# Altium PCB PCB1.PcbDoc
Units mm, origin at the board's own origin, x right, y up, seen from the top; angles counter-clockwise.
Board outline 20 x 20 mm, 2 copper layers (Top Layer, Bottom Layer); 5 components, 4 nets, 10 pads, 1 vias.
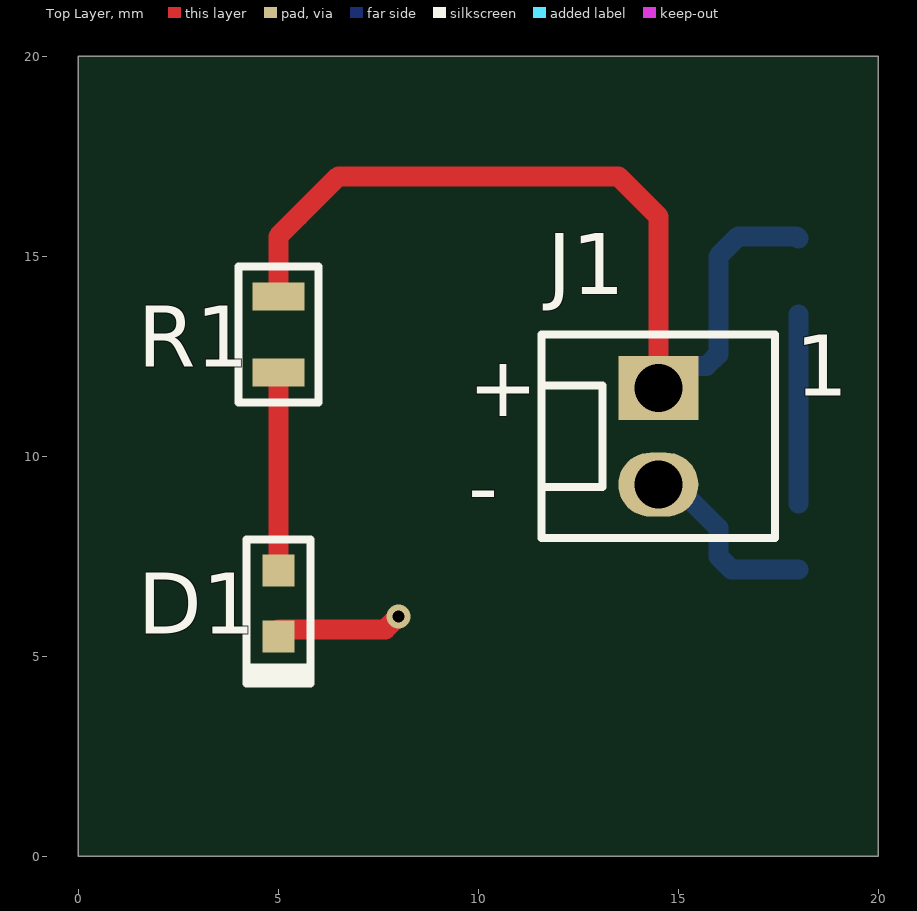
[diagram p0: Top Layer view]
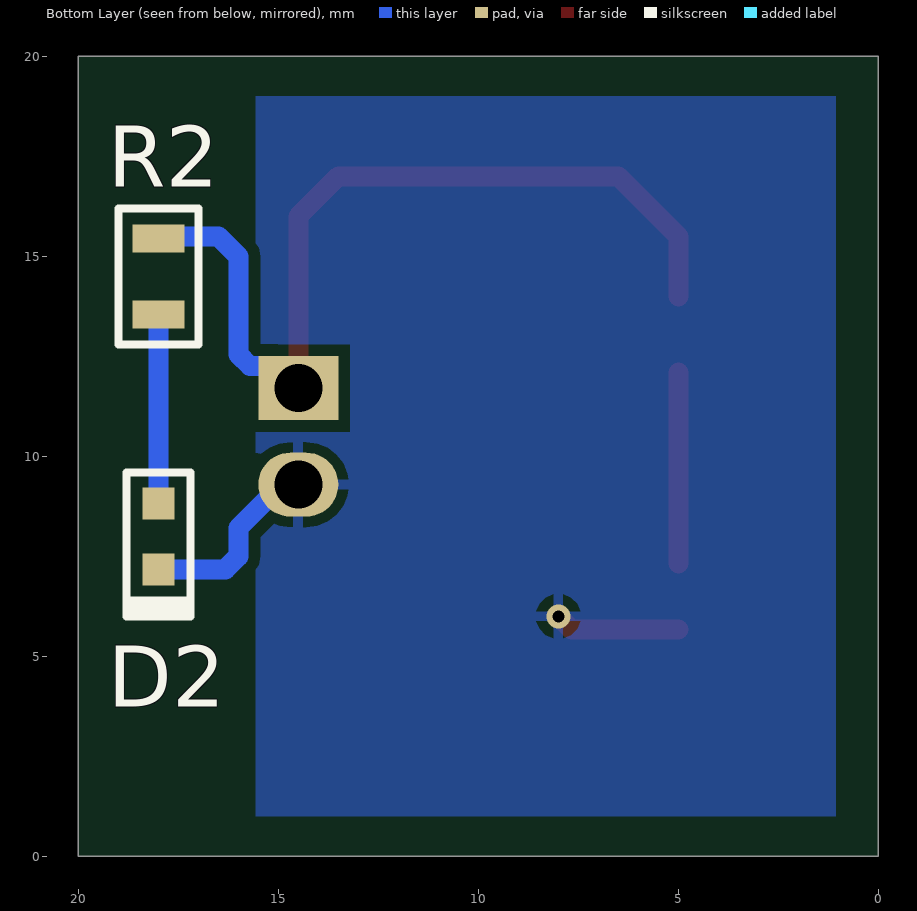
[diagram p1: Bottom Layer view, seen from below]
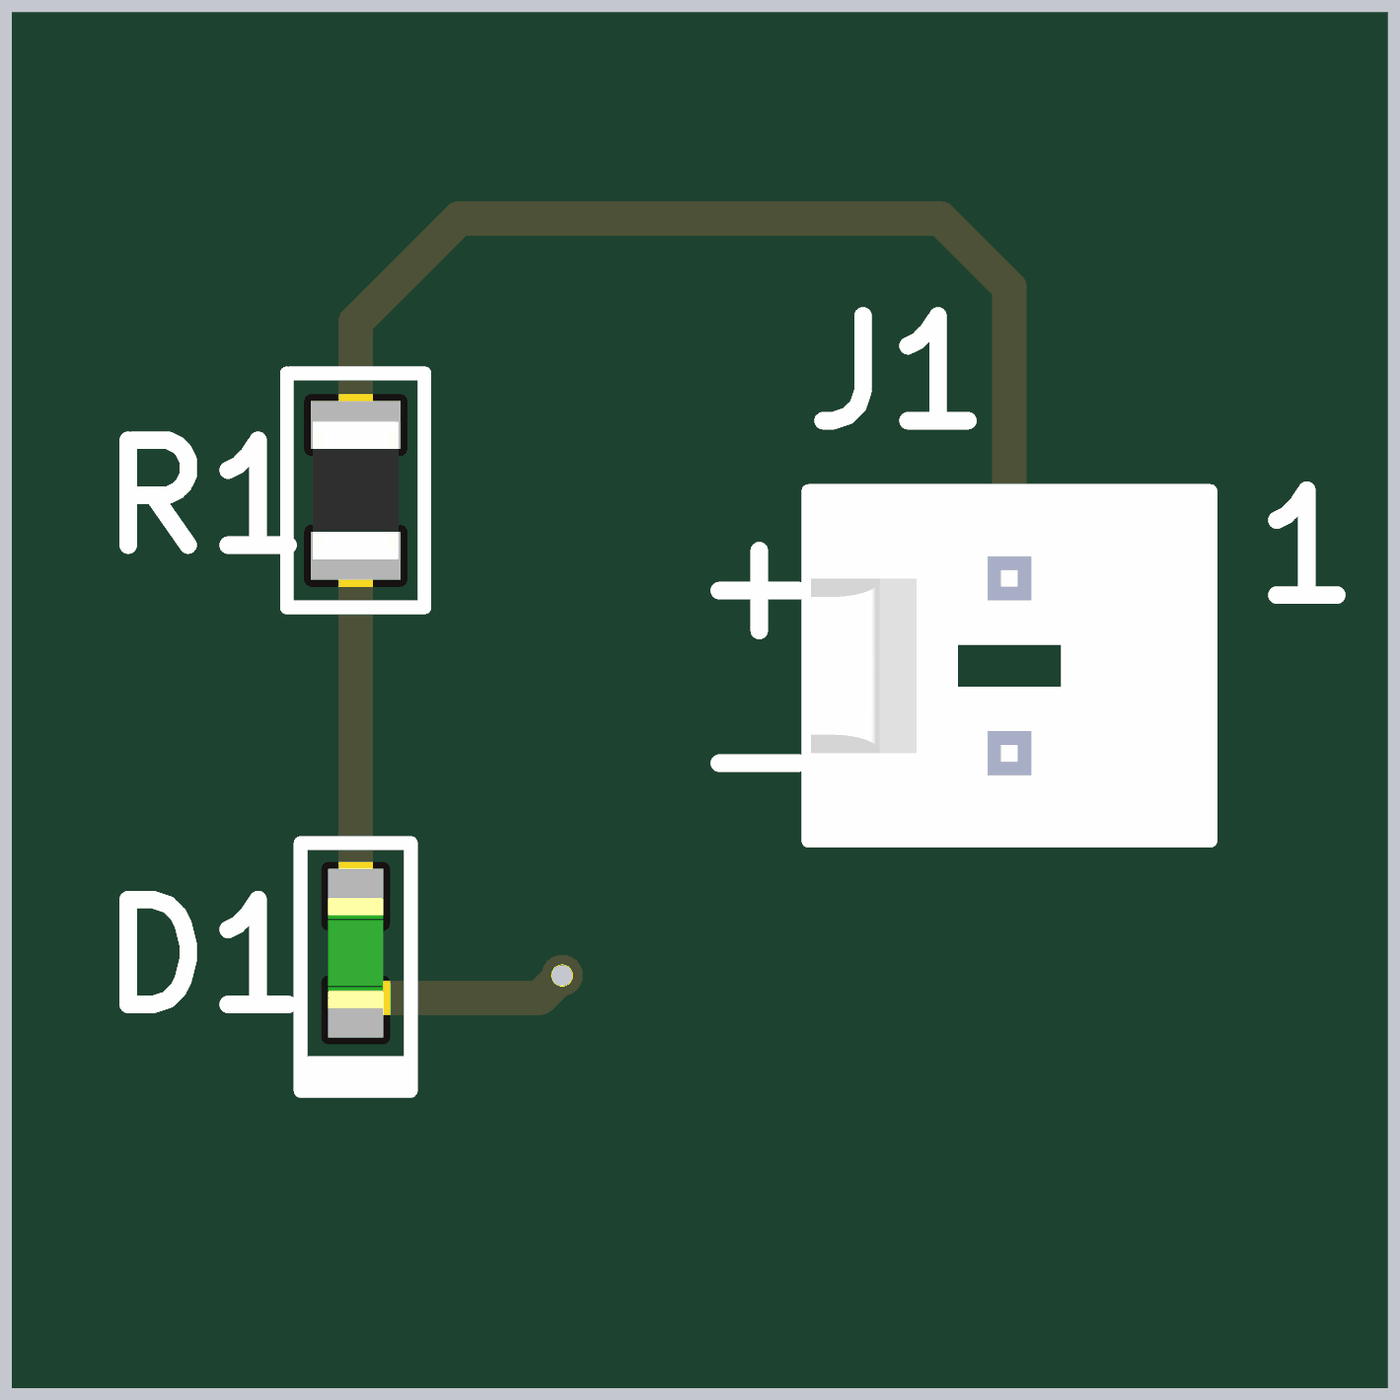
[diagram p2: 3D render of the assembled board from above, using the file's embedded part models]

## Layer stack, top to bottom
Top Solder: solder mask 0.0102, Solder Resist, Dk 3.5
Top Layer: signal copper 0.0356
Dielectric 1: dielectric 0.32, FR-4, Dk 4.8
Bottom Layer: signal copper 0.0356
Bottom Solder: solder mask 0.0102, Solder Resist, Dk 3.5

## Board outline
0,0 20,0 20,20 0,20

## Design rules (kind name [scope] priority, off if disabled: settings)
Clearance [All] p1: gap=0.3 ignorepadtopadclearanceinfootprint=FALSE
PolygonConnect [All] p1: connectstyle=Relief reliefconductorwidth=0.254 reliefentries=4 polygonreliefangle="90 Angle" airgapwidth=0.254
RoutingVias [All] p1: holewidth=0.3 width=0.6 viastyle="Through Hole" minholewidth=0.3 minwidth=0.6 maxholewidth=0.3 maxwidth=0.6
SilkToSolderMaskClearance [IsPad] p1: minsilkscreentomaskgap=0.1 clearancetoexposedcopper=TRUE
SolderMaskExpansion [All] p1: expansion=0.102 istentingtop=FALSE
Width [All] p1: maxlimit=1 minlimit=0.3 preferedwidth=0.5
29 further rules are at their usual default settings.

## Components (designator, comment, footprint, x,y, rotation, side; value= is the part's Value field where it differs from the comment)
D1 "Orange" "LED0603 O" 5,6.325 r90 top
D2 "Orange" "LED0603 O" 18,8 r90 bottom
J1 "1X2 Header" "HEADER 1X2" 14.5,10.5 r0 top
R1 "360R" R0805 5,13.05 r90 top
R2 "360R" R0805 18,14.5 r90 bottom

## Footprints (in the part's own frame and the unit in brackets; to place one, negate y for a bottom-side part, rotate by r counter-clockwise, add the part's x,y. Pads: shape width x height; smd on the part's side, far side on the other; paste and mask are expansions set on the pad)
"HEADER 1X2" [mm]
  rect 2x1.6 hole 1.2: 1(0,1.207)
  oval 2x1.6 hole 1.2: 2(0,-1.206)
  silkscreen extent -2.92,-2.54 2.92,2.54, body extent -2.88,-2.54 2.92,2.54, height 11.71
"LED0603 O" [mm]
  rect 0.8x0.8 smd: 1(-0.825,0) 2(0.825,0)
  silkscreen extent -2,-0.8 1.6,0.8, body extent -0.8,-0.4 0.8,0.4, height 0.4
R0805 [mm]
  rect 0.7x1.3 smd: 1(-0.95,0) 2(0.95,0)
  silkscreen extent -1.7,-1 1.7,1, body extent -1,-0.62 1,0.62, height 0.61

## Part data
D1 D2: library part LNJ8W0C83RA, "Orange 620nm LED Indication - Discrete 1.95V 0603 (1608 Metric)", Case Code (Imperial)=0603, Case Code (Metric)=1608, Forward Current=5mA, Forward Voltage=1.95V, Manufacturer="Panasonic SSG", Package Quantity=5000, Supplier Part Number 1=P14141CT-ND, Case/Package=0603, Category="LEDs Optoelectronics", Color=Orange, ComponentLink1Description=https://datasheet.ciiva.com/5685/1385197-5685549.pdf?src-supplier=Farnell, ComponentLink1URL=https://datasheet.ciiva.com/5685/1385197-5685549.pdf?src-supplier=Farnell, ComponentLink2Description=https://datasheet.ciiva.com/11775/0900766b80f0a8cc-11775425.pdf?src-supplier=Rs, ComponentLink2URL=https://datasheet.ciiva.com/11775/0900766b80f0a8cc-11775425.pdf?src-supplier=Rs, Dominant Wavelength=620nm, Height=0.55mm, Length=1.6mm, Lens Style=Round, Luminous Intensity=17.5mcd, Manufacturer Part Number=LNJ8W0C83RA, Mount="Surface Mount", Number of LEDs=1, Number of Pins=2, Packaging="Tape and Reel", Pricing 1="1=0.13000, 10=0.11200 (USD)", RoHS=Yes, RoHS Compliant=Yes, Stock 1=87, Supplier 1=Digi-Key, Test Current=5mA, Viewing Angle=165°, Wavelength=620nm, Width=0.8mm
J1: library part 22-27-2021, "CONN HEADER 2POS .100 VERT TIN", Color=White, Contact Resistance=20mR, Current Rating=4A, Flammability Rating="UL94 V-0", Housing Color=Natural, Insulation Resistance=50GR, Manufacturer=Molex, Max Operating Temperature=75°C, Min Operating Temperature=0°C, Package Quantity=24000, Supplier Part Number 1=WM4111-ND, Voltage Rating=500V, Voltage Rating (AC)=250V, Approvals=UL,CSA, Category="Headers and Wire Housings", Contact Gender=Male, Contact Material=Tin, Contact Plating=Tin, Contact Type=-, Depth=5.8mm, Gender=Male, Height=11.7mm, Housing Material=Nylon, Lead Free="Lead Free", Lead Pitch=2.54mm, Length=10.16mm, Manufacturer Part Number=22-27-2021, Material=Nylon, Max Current Rating=4A, Mount="Through Hole", Number of Circuits=2, Number of Contacts=2, Number of Positions=2, Number of Rows=1, Orientation=Straight, Packaging=Bulk, Pitch=2.54mm, Pricing 1="1=0.30000, 10=0.24500, 100=0.18000, 1000=0.14317, 5000=0.12272, 10000=0.11453 (USD)", Radiation Hardening=No, RoHS=Yes, RoHS Compliant=Yes, Series=6410, Stock 1=156265, Supplier 1=Digi-Key, Termination="Through Hole", Voltage Rating (DC)=250V, Weight=0.00769oz, Working Voltage=250V
R1 R2: library part CRCW0805360RFKEA, "RES SMD 360 OHM 1% 1/8W 0805", Case Code (Imperial)=0805, Case Code (Metric)=2012, Manufacturer=Vishay, Max Operating Temperature=155°C, Max Power Dissipation=125mW, Min Operating Temperature=-55°C, Package Quantity=5000, Ratings=AEC-Q200, Resistor Type="Thick Film", Supplier Part Number 1=541-360CDKR-ND, Temperature Coefficient=100ppm/°C, Tolerance=1%, Voltage Rating=150V, Case/Package=0805, Category="Chip SMD Resistors", ComponentLink1Description=https://datasheet.ciiva.com/2467/dcrcwe3-2467773.pdf?src-supplier=Digi-Key, ComponentLink1URL=https://datasheet.ciiva.com/2467/dcrcwe3-2467773.pdf?src-supplier=Digi-Key, Contact Plating=Tin, Depth=1.25mm, Features="Automotive AEC-Q200", Height=0.45mm, Lead Free="Lead Free", Length=2mm, Manufacturer Part Number=CRCW0805360RFKEA, Military Standard=Not, Number of Pins=2, Number of Terminals/Pins=2, Number of Terminations=2, Packaging="Cut Tape", Power Rating=125mW, Pricing 1="1=0.10000, 10=0.06700, 100=0.02710, 1000=0.01219, 2500=0.01058 (USD)", Radiation Hardening=No, Resistance=360R, RoHS=Yes, RoHS Compliant=Yes, Series=CRCW, Stock 1=2500, Supplier 1=Digi-Key, Technology="THICK FILM", Termination=SMD/SMT, Voltage Rating (DC)=150V, Weight=0.000194oz, Width=1.25mm

## Via types
v1: diameter 0.6, hole 0.3, Top Layer to Bottom Layer, tented both sides, 1 vias

## Nets (pads, with @x,y where several pads share a name; then routed paths per layer and width w, separated by ;. In a path a pad name is that pad's centre, name@x,y a point inside that pad or via, vN(x,y) a via of type N, cw(c..) or ccw(c..) an arc to the next point about the centre after c; other vN are vias at no path point)
+3V3: J1.1 R1.2 R2.2 | length 22.9
  Top Layer w0.5: R1.2 5,15.5 5.5,16 6.5,17 13.5,17 14.5,16 J1.1
  Bottom Layer w0.5: J1.1 15.05,12.257 15.707,12.257 16,12.549 16,15 16.5,15.5 17.95,15.5 R2.2
DIODE1: D1.2 R1.1 | length 4.8
  Top Layer w0.5: D1.2@5,7.325 R1.1
DIODE2: D2.2 R2.1 | length 4.7
  Bottom Layer w0.5: D2.2 R2.1
GND: D1.1 D2.1 J1.2 | length 7.9
  Top Layer w0.5: D1.1@5,5.675 7.675,5.675 v1(8,6)
  Bottom Layer w0.5: J1.2 14.914,9.294 16,8.207 16,7.5 16.325,7.175 D2.1

## Polygon pours and split planes (outlines as drawn)
GND on Bottom Layer "GND_L02_P003" (solid, pour order 3): 1.061,19 1.061,1 15.561,1 15.561,19

## Silkscreen, mask and mechanical layers (free items; w line width, h text height)
Top Overlay:
  text "+" at 9.754,11 h1.52
  text "-" at 9.754,8.492 h1.52
Board Outline:
  the board outline again, w0.1

## Text inside footprints (layer, text, board x,y; h text height)
J1: Top Overlay "1" at 17.929,11.516 h1.52